# EAGLE board io-board-smaller (EAGLE 6.5.0)
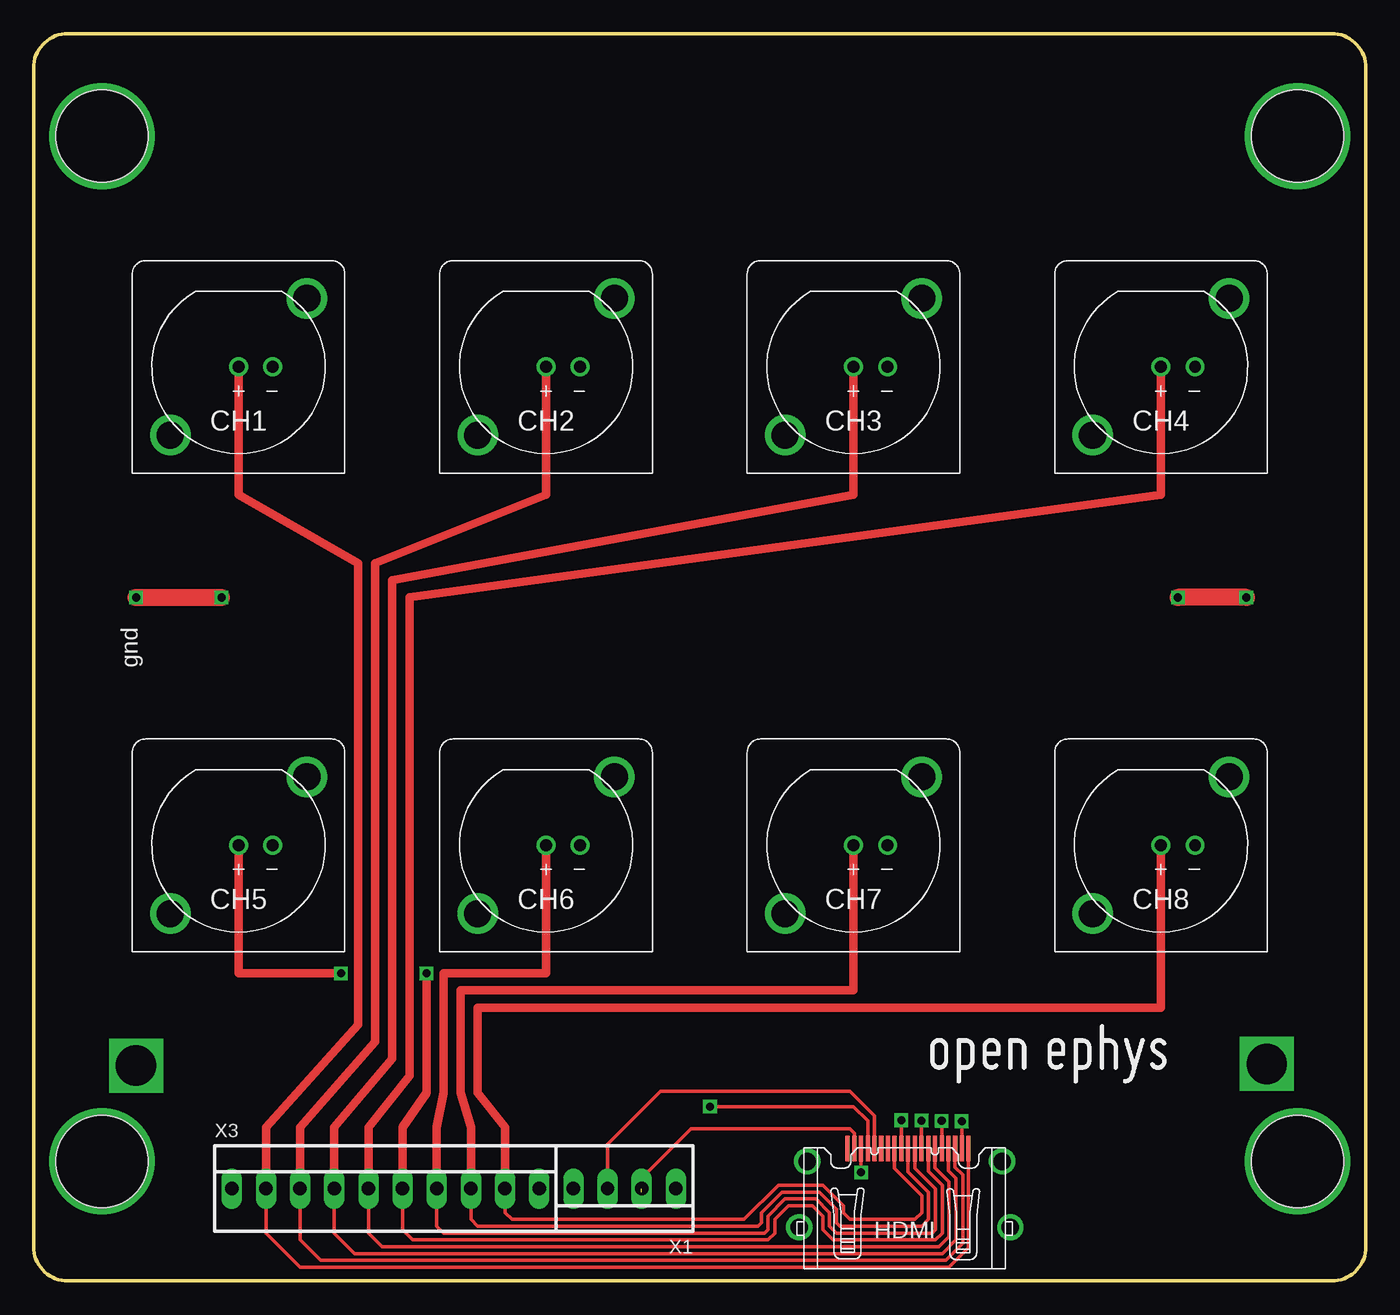
[diagram p0: board, top side]
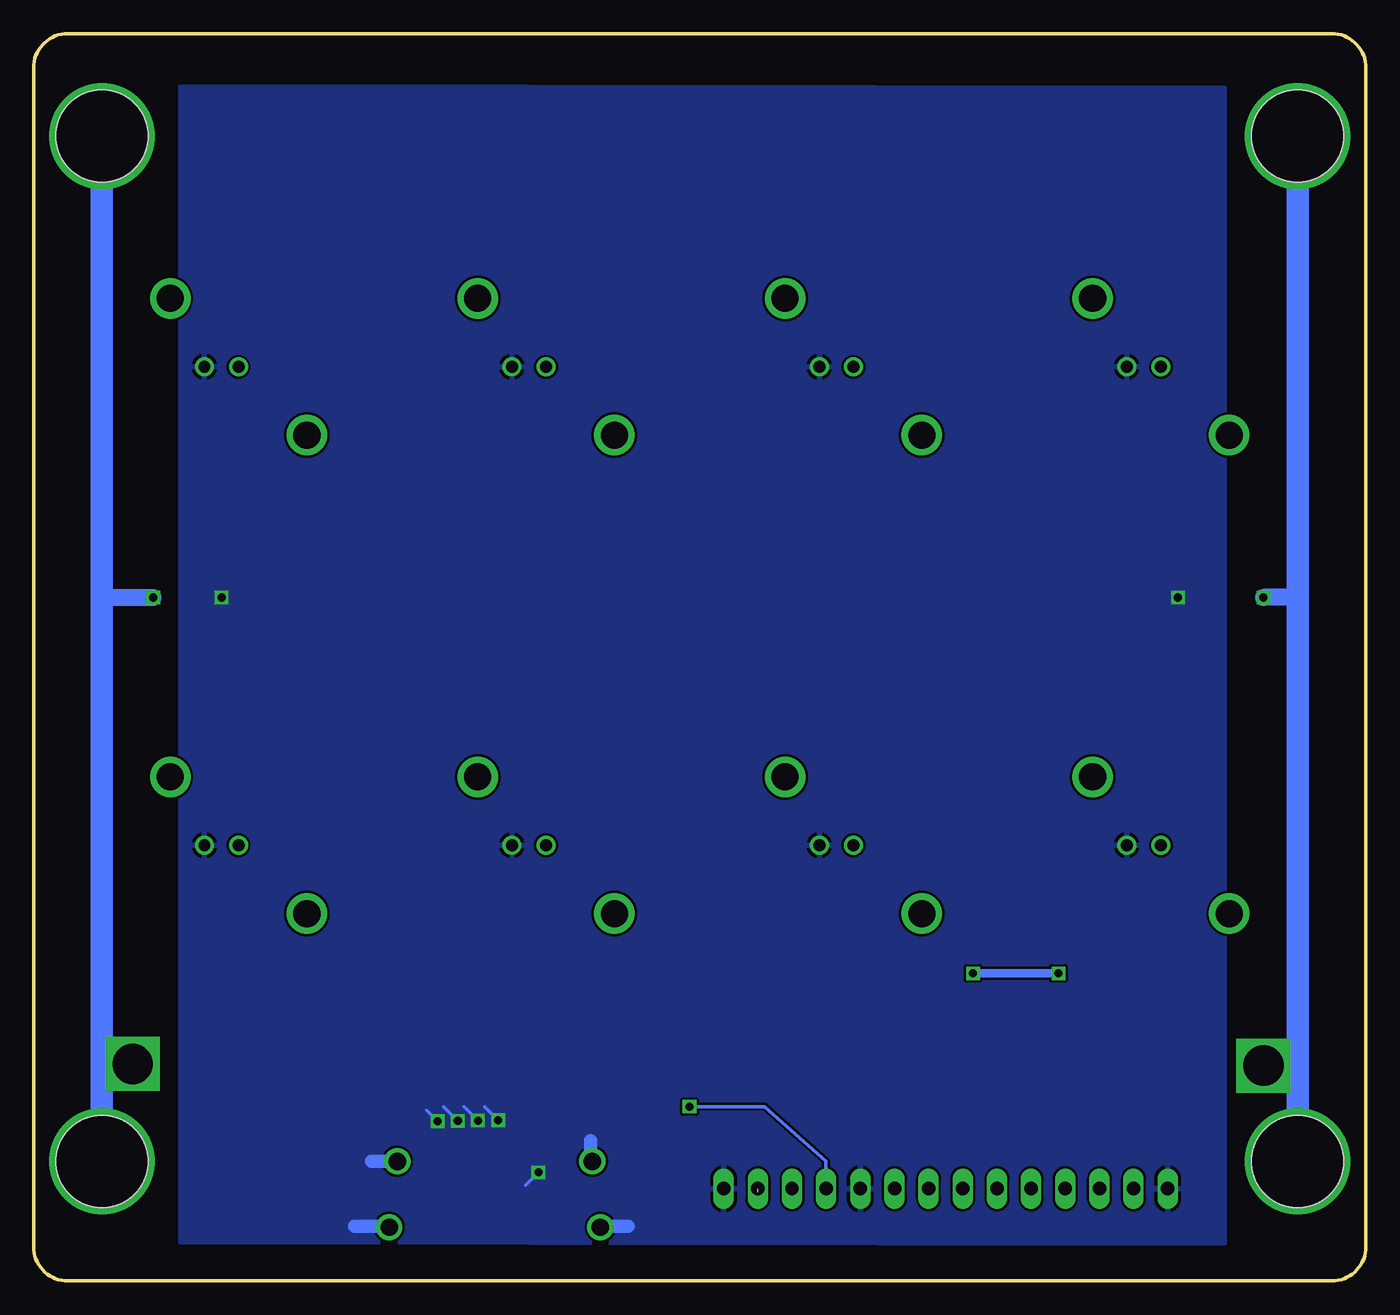
[diagram p1: board, bottom side, seen from below]

Size 99.06 x 92.71 mm. Coordinates in mm from the lower left corner, seen from the top.
Outline: 2.54,92.71 96.52,92.71 arc-90 99.06,90.17 99.06,2.54 arc-90 96.52,0 2.54,0 arc-90 0,2.54 0,90.17 arc-90 2.54,92.71
Copper layers (1*16): Top 0.035mm / dielectric 1.5mm / Bottom 0.035mm
Design rules "default": minimum track width 10mil, minimum drill 10mil, track to track 7mil, track to pad 7mil, pad to pad 7mil, via to via 7mil, smd to smd 7mil, copper to edge 25mil, drill to drill 7mil, minimum pad ring 10mil, minimum via ring 8mil, stop-mask expansion 4mil, vias tented up to drill 0mil, thermal gap 10mil
Holes 6.86 mm at 5.08,85.09 5.08,8.89 93.98,85.09 93.98,8.89

## Footprints (pad centres in the part's own frame; a part is rotated, then mirrored left to right if it is on the bottom)
BNC_VERTICAL = drill 0.89: P$1 0,0; P$2 2.54,0 | drill 2.01: P$3 5.08,5.08; P$4 -5.08,-5.08
HDMI_A = smd 0.3 x 1.9: P$1 4.75,0.95; P$2 4.25,0.95; P$3 3.75,0.95; P$4 3.25,0.95; P$5 2.75,0.95; P$6 2.25,0.95; P$7 1.75,0.95; P$8 1.25,0.95; P$9 0.75,0.95; P$10 0.25,0.95; P$11 -0.25,0.95; P$12 -0.75,0.95; P$13 -1.25,0.95; P$14 -1.75,0.95; P$15 -2.25,0.95; P$16 -2.75,0.95; P$17 -3.25,0.95; P$18 -3.75,0.95; P$19 -4.25,0.95 | drill 1.3: P$20 -7.25,0; P$21 7.25,0; P$22 7.85,-4.9; P$23 -7.85,-4.9
22-23-2041 = drill 1 long: 1 -3.81,0; 2 -1.27,0; 3 1.27,0; 4 3.81,0
22-23-2101 = drill 1 long: 1 -11.43,0; 2 -8.89,0; 3 -6.35,0; 4 -3.81,0; 5 -1.27,0; 6 1.27,0; 7 3.81,0; 8 6.35,0; 9 8.89,0; 10 11.43,0

## Placement (x,y rotation side)
CH1  BNC_VERTICAL  [BNC_VERTICAL]  15.24,67.94 0 top
CH2  BNC_VERTICAL  [BNC_VERTICAL]  38.1,67.94 0 top
CH3  BNC_VERTICAL  [BNC_VERTICAL]  60.96,67.94 0 top
CH4  BNC_VERTICAL  [BNC_VERTICAL]  83.82,67.94 0 top
CH5  BNC_VERTICAL  [BNC_VERTICAL]  15.24,32.38 0 top
CH6  BNC_VERTICAL  [BNC_VERTICAL]  38.1,32.38 0 top
CH7  BNC_VERTICAL  [BNC_VERTICAL]  60.96,32.38 0 top
CH8  BNC_VERTICAL  [BNC_VERTICAL]  83.82,32.38 0 top
HDMI  HDMI  [HDMI_A]  64.77,8.89 0 top
U$2  [OPEN_EPHYS_LOGO]  66.04,14.22 0 top
X1  22-23-2041  [22-23-2041]  43.94,6.86 180 top
X3  22-23-2101  [22-23-2101]  26.16,6.86 0 top

## Library data of the parts
CH1-CH8 U$2 = josh
HDMI = open-ephys
X1 = con-molex; MF: MOLEX; MPN: 22-23-2041; OC_FARNELL: 1462920; OC_NEWARK: 38C0355
X3 = con-molex; MF: MOLEX; MPN: 22-23-2101; OC_FARNELL: 1756828; OC_NEWARK: 94C0765

## Nets
CH6: CH6.P$1 HDMI.P$9 X3.7
DGND: CH1.P$2 CH2.P$2 CH3.P$2 CH4.P$2 CH5.P$2 CH6.P$2 CH7.P$2 CH8.P$2 HDMI.P$2 HDMI.P$5 HDMI.P$8 HDMI.P$11 HDMI.P$17 X1.1 X3.1 X3.10
I2C_CLK: HDMI.P$15 X1.3
I2C_DAT: HDMI.P$16 X1.4
N$2: CH3.P$1 HDMI.P$4 X3.4
N$3: CH2.P$1 HDMI.P$3 X3.3
N$4: CH1.P$1 HDMI.P$1 X3.2
N$5: CH5.P$1 HDMI.P$7 X3.6
N$7: CH7.P$1 HDMI.P$10 X3.8
N$8: CH8.P$1 HDMI.P$12 X3.9
N$23: CH4.P$1 HDMI.P$6 X3.5
VCC: HDMI.P$18 X1.2

## Tracks (layer width: path | path; a pad name or v marks a point on that pad's centre or on a via)
CH6
  Top 0.254: 65.53,9.6 HDMI.P$9 65.52,8.39 67.06,6.86 67.06,3.81 66.8,3.56 59.69,3.56 59.18,4.06 59.18,5.08 58.17,6.1 55.88,6.1 54.61,4.83 54.61,3.81 54.36,3.56 30.48,3.56 29.97,4.06 X3.7
  Top 0.635: CH6.P$1 38.1,22.86 30.48,22.86 30.48,13.97 29.97,11.43 X3.7
DGND  (via drill 0.6)
  Top 0.254: HDMI.P$2 v69.02,11.87 | HDMI.P$5 v67.52,11.89 | HDMI.P$8 v66.02,11.92 | HDMI.P$11 v64.52,11.94 | HDMI.P$17 v61.52,8.08
  Top 1.27: v90.17,50.8 v85.09,50.8 | v7.62,50.8 v13.97,50.8
  Bottom 0.254: v69.02,11.87 69.85,12.7 | v67.52,11.89 68.58,12.95 | v66.02,11.92 67.06,12.95 | v64.52,11.94 65.53,12.95 | v61.52,8.08 62.48,7.11
  Bottom 1.016: 72.64,4.06 75.18,4.06 | 57.66,8.89 57.66,10.41 | 56.9,4.06 54.86,4.06 | 72.14,8.89 73.91,8.89
  Bottom 1.27: 93.98,50.8 v90.17,50.8 | 5.08,50.8 v7.62,50.8
  pour Bottom: 10.54,88.65 10.54,2.79 88.14,2.92 88.14,88.77
I2C_CLK
  Top 0.254: HDMI.P$15 62.52,12.28 60.71,14.1 46.61,14.1 42.67,10.16 X1.3
I2C_DAT  (via drill 0.6)
  Top 0.254: HDMI.P$16 62.02,11.89 60.96,12.95 v50.29,12.95
  Bottom 0.254: X1.4 40.13,8.89 44.7,12.95 v50.29,12.95
N$2
  Top 0.254: HDMI.P$4 68.02,8.18 68.58,7.62 68.58,3.05 67.56,2.03 23.88,2.03 22.35,3.56 X3.4
  Top 0.635: CH3.P$1 60.96,58.42 26.67,52.07 26.67,16.51 22.35,11.43 X3.4
N$3
  Top 0.254: HDMI.P$3 68.52,8.44 69.09,7.87 69.09,2.79 67.82,1.52 21.34,1.52 19.81,3.05 X3.3
  Top 0.635: CH2.P$1 38.1,58.42 25.4,53.34 25.4,17.78 19.81,11.43 X3.3
N$4
  Top 0.254: HDMI.P$1 69.52,2.46 68.07,1.02 19.81,1.02 17.27,3.56 X3.2
  Top 0.635: CH1.P$1 15.24,58.42 24.13,53.34 24.13,19.05 17.27,11.43 X3.2
N$5  (via drill 0.6)
  Top 0.254: HDMI.P$7 66.52,8.16 67.56,7.11 67.56,3.56 67.06,3.05 59.44,3.05 58.67,3.81 58.67,4.83 57.91,5.59 56.13,5.59 55.12,4.57 55.12,3.56 54.61,3.05 28.19,3.05 27.43,3.81 X3.6
  Top 0.635: CH5.P$1 15.24,22.86 v22.86,22.86 | v29.21,22.86 29.21,13.97 27.43,11.43 X3.6
  Bottom 0.635: v22.86,22.86 v29.21,22.86
N$6  (via drill 3)
  other vias: 7.62,16
N$7
  Top 0.254: HDMI.P$10 65.02,8.13 66.55,6.6 66.55,4.57 66.04,4.06 59.94,4.06 59.69,4.32 59.69,5.33 58.42,6.6 55.63,6.6 54.1,5.08 54.1,4.32 53.85,4.06 33.02,4.06 32.51,4.57 X3.8
  Top 0.635: CH7.P$1 60.96,21.59 31.75,21.59 31.75,13.97 32.51,11.43 X3.8
N$8
  Top 0.254: HDMI.P$12 64.02,8.37 66.04,6.35 66.04,5.08 65.53,4.57 60.71,4.57 60.2,5.08 60.2,5.59 58.67,7.11 55.37,7.11 52.83,4.57 35.56,4.57 35.05,5.08 X3.9
  Top 0.635: CH8.P$1 83.82,20.32 33.02,20.32 33.02,13.97 35.05,11.43 X3.9
N$9  (via drill 3)
  other vias: 91.69,16.13
N$23
  Top 0.254: HDMI.P$6 67.02,8.42 68.07,7.37 68.07,3.3 67.31,2.54 25.91,2.54 24.89,3.56 X3.5
  Top 0.635: CH4.P$1 83.82,58.42 27.94,50.8 27.94,15.24 24.89,11.43 X3.5
S$1  (via drill 6.86)
  other vias: 5.08,85.09
S$6  (via drill 6.86)
  other vias: 5.08,8.89
S$7  (via drill 6.86)
  other vias: 93.98,85.09
S$12  (via drill 6.86)
  other vias: 93.98,8.89
S$13
  Bottom 1.676: 5.08,85.09 5.08,8.89
S$14
  Bottom 1.676: 93.98,85.09 93.98,8.89
VCC  (1 unrouted)
  Top 0.254: HDMI.P$18 61.02,10.99 60.71,11.3 48.9,11.3 45.21,7.62 45.21,6.6

## Text on the board
tNames: gnd
tDocu: 1 | 2 | 3 | 4 | 5 | 6 | 7 | 8 | 1 2 3 4 5 6 7 8 | gnd | i2c dat | i2c clk | 5vdc | gnd | I/O Board | gnd | version 2.0 | August 2013